# Altium PCB mainPCB_V2.PcbDoc
Units mil, origin at the board's own origin, x right, y up, seen from the top; angles counter-clockwise.
Board outline 4475 x 3960 mil, 2 copper layers (Top Layer, Bottom Layer); 107 components, 80 nets, 371 pads, 23 vias.
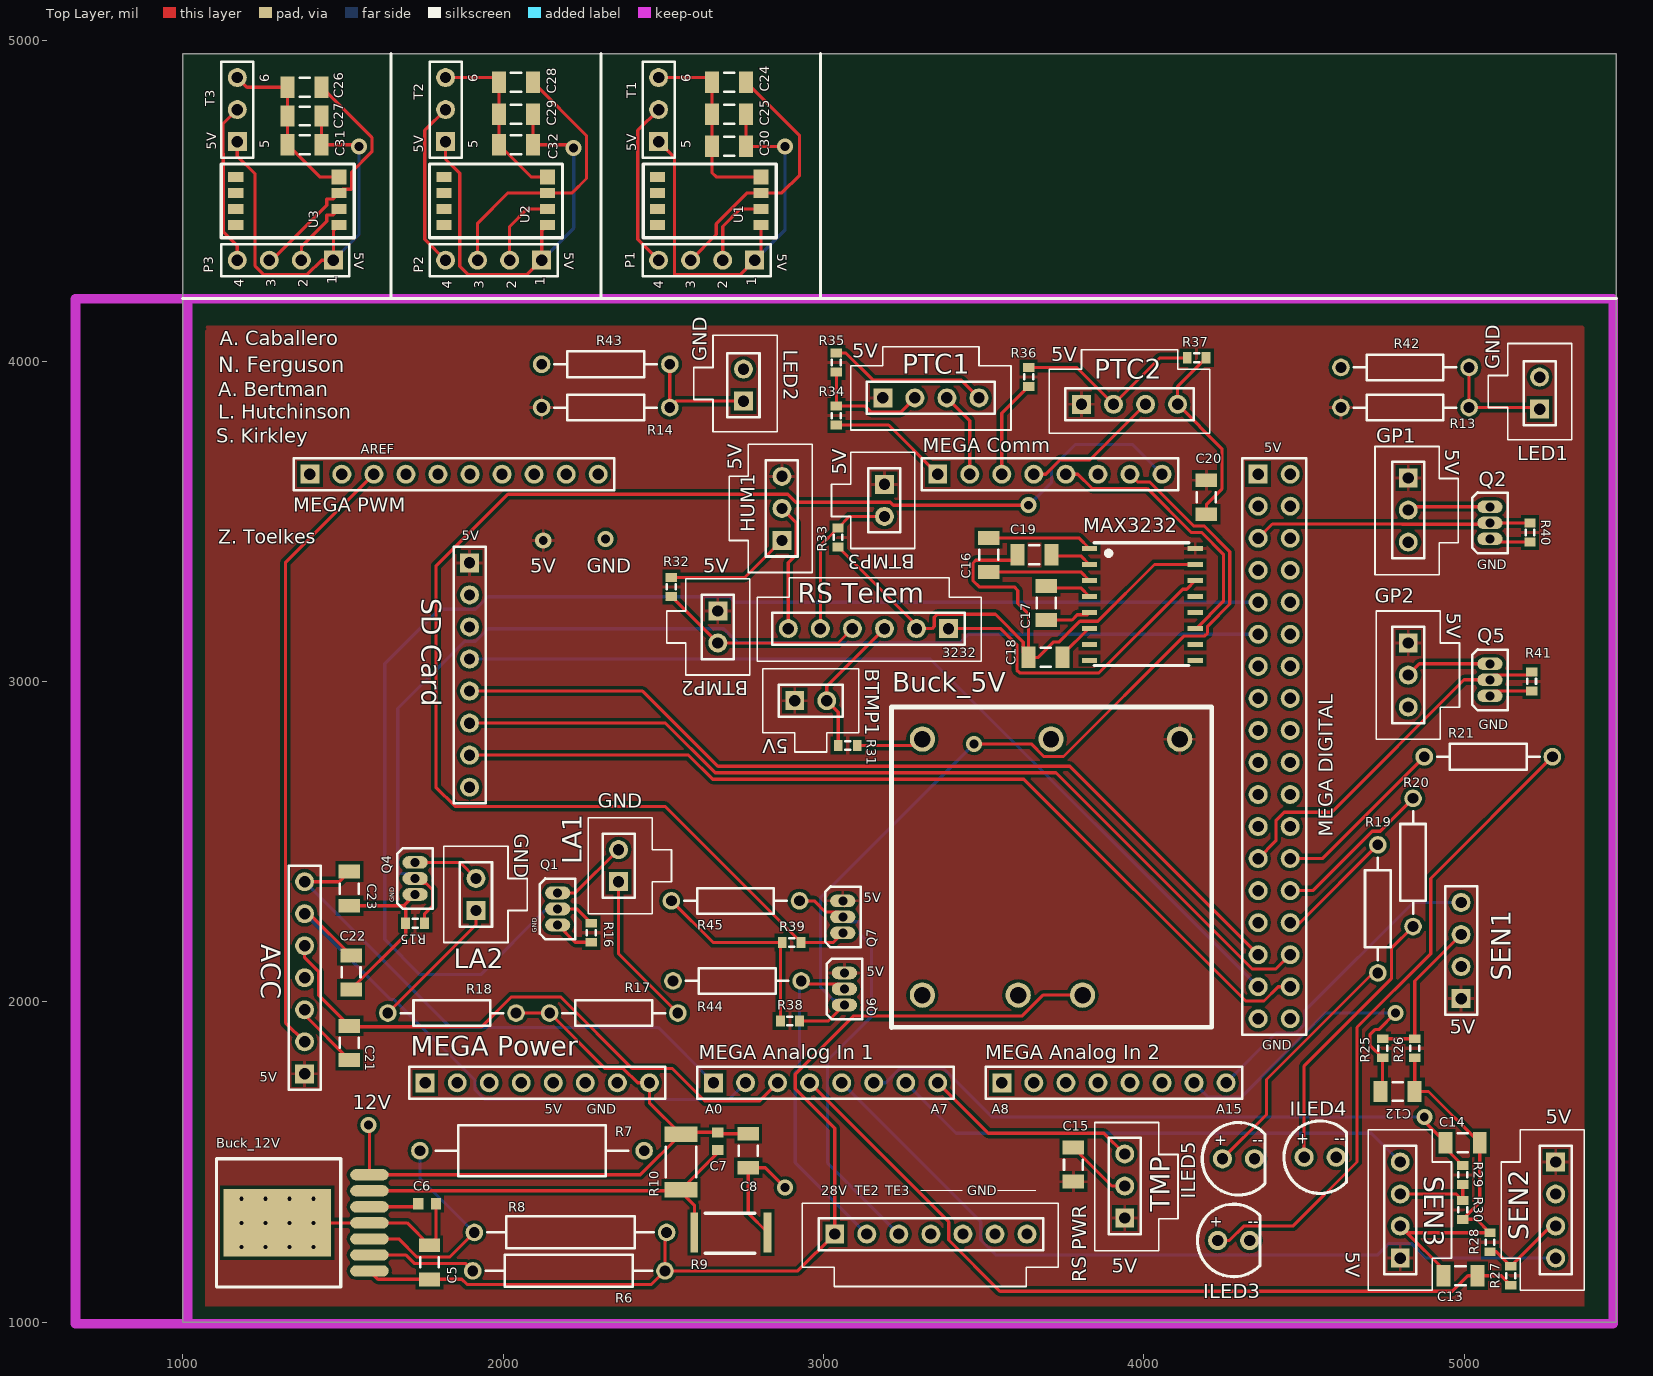
[diagram p0: Top Layer view]
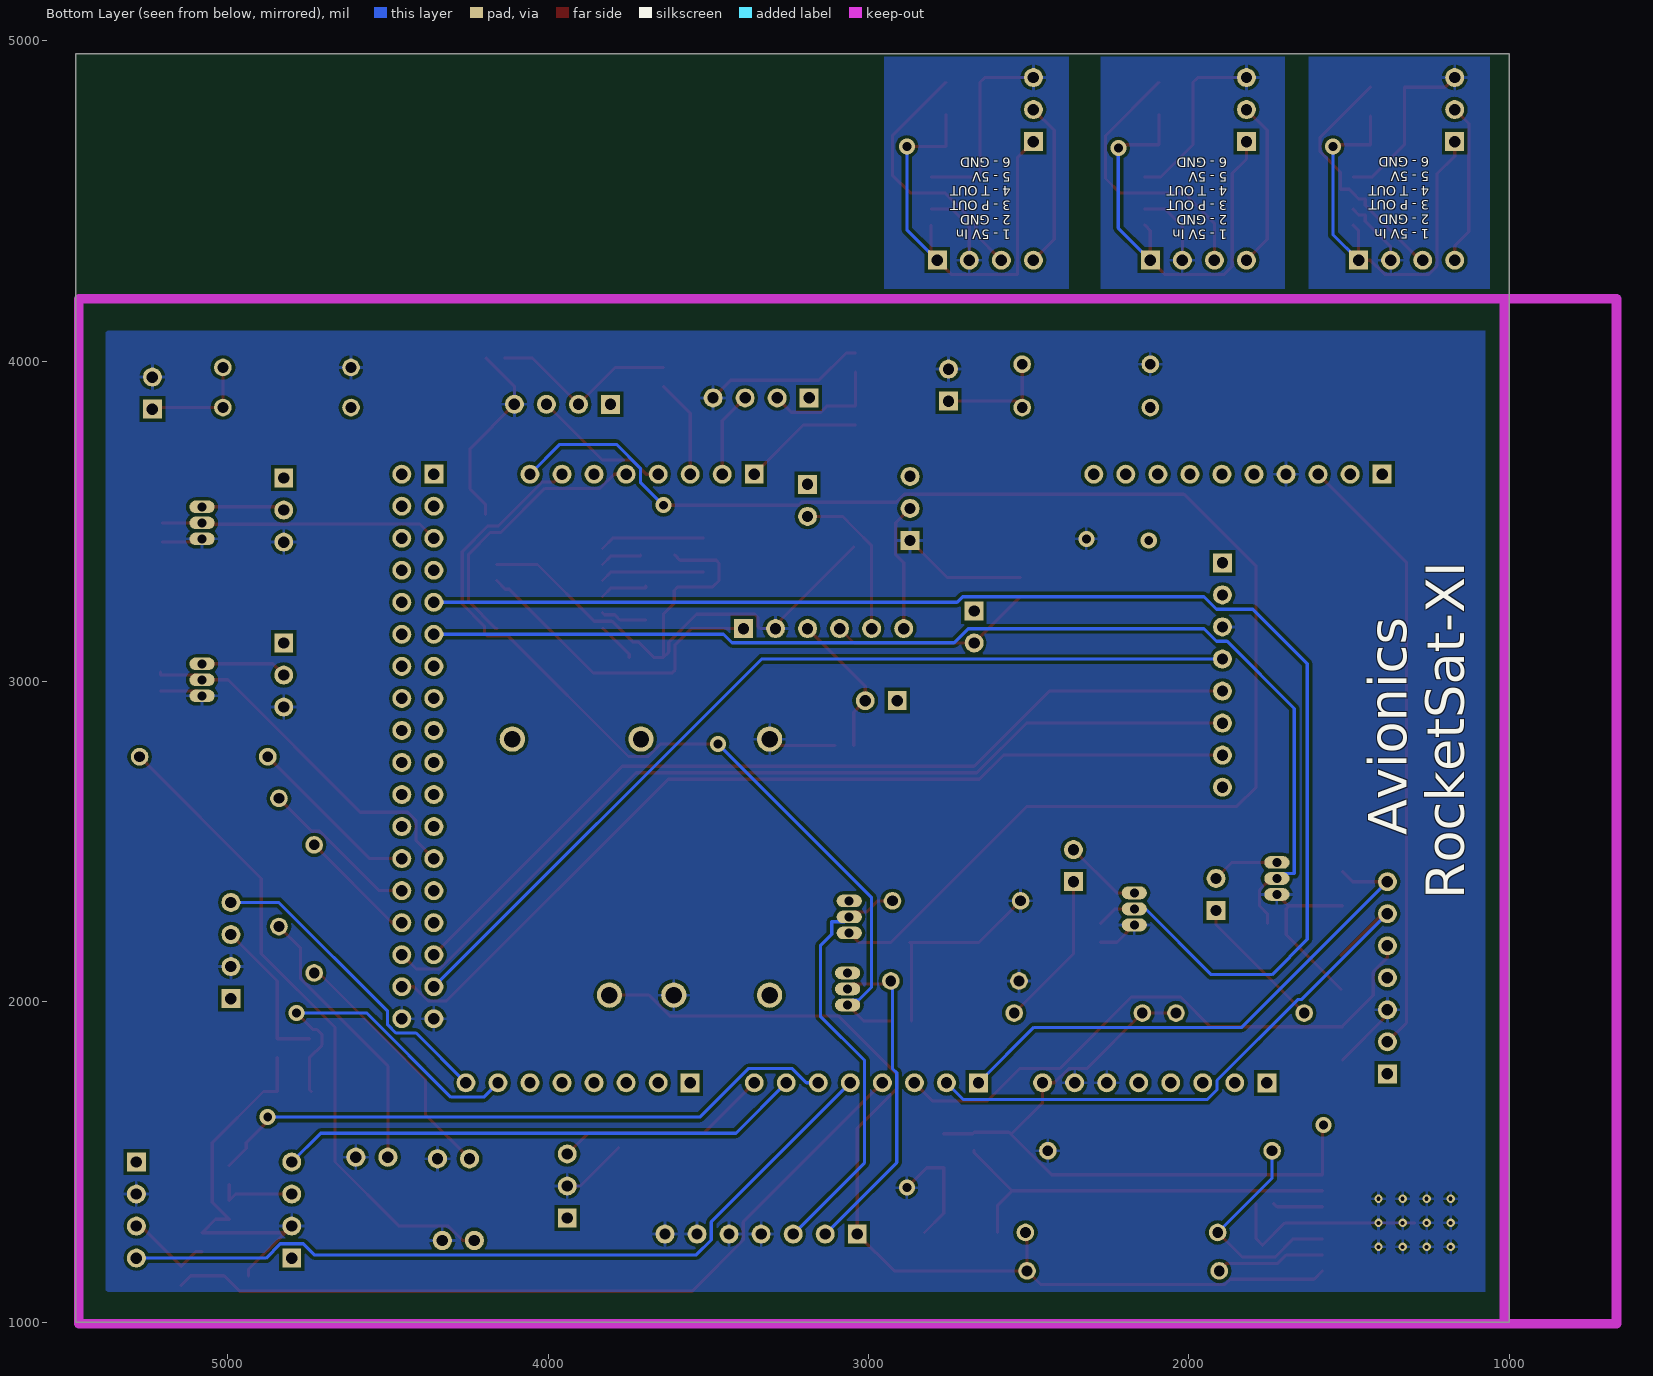
[diagram p1: Bottom Layer view, seen from below]

## Layer stack, top to bottom
Top Solder: solder mask 0.4, Solder Resist, Dk 3.5
Top Layer: signal copper 1.4
Dielectric 1: dielectric 12.6, FR-4, Dk 4.8
Bottom Layer: signal copper 1.4
Bottom Solder: solder mask 0.4, Solder Resist, Dk 3.5

## Board outline
1000,1000 5475,1000 5475,4960 1000,4960

## Design rules (kind name [scope] priority, off if disabled: settings)
Clearance [All] p1: gap=10 ignorepadtopadclearanceinfootprint=FALSE except(0: Arc-Hole Track-Hole SMDPad-Hole THPad-Hole Via-Hole Fill-Hole Poly-Hole Region-Hole Text-Hole)
PolygonConnect [All] p1: connectstyle=Relief reliefconductorwidth=10 reliefentries=4 polygonreliefangle="90 Angle" airgapwidth=10
RoutingVias [All] p1: holewidth=28 width=50 viastyle="Through Hole" minholewidth=28 minwidth=50 maxholewidth=28 maxwidth=50
SolderMaskExpansion [All] p1: expansion=4
Width [All] p1: maxlimit=10 minlimit=10 preferedwidth=10
30 further rules are at their usual default settings.

## Classes and differential pairs
component class Analog_Input: ACC C12 C13 C14 C15 C21 C22 C23 "MEGA Analog In 1" "MEGA Analog In 2" "MEGA PWM" R25 R26 R27 R28 R29 R30 SEN1 SEN2 SEN3 TMP
component class ArduinoPWR-DIG_SDCard: ILED3 ILED4 ILED5 "MEGA DIGITAL" "MEGA Power" R19 R20 R21 "SD Card"
component class GoPro_Actuator_LED: GP1 GP2 LA1 LA2 LED1 LED2 Q1 Q2 Q4 Q5 R13 R14 R15 R16 R17 R18 R40 R41 R42 R43
component class Power_TimerEvents: Buck_5V Buck_12V C5 C6 C7 C8 Q6 Q7 R6 R7 R8 R9 R10 R38 R39 R44 R45 "RS PWR"
component class Telemetry_AnalogSensors_PTC08_Shifter: BTMP1 BTMP2 BTMP3 C16 C17 C18 C19 C20 HUM1 MAX3232 "MEGA Comm" PTC1 PTC2 R31 R32 R33 R34 R35 R36 R37 "RS Telem"
component class temp_presX3: C24 C25 C26 C27 C28 C29 C30 C31 C32 P1 P2 P3 T1 T2 T3 U1 U2 U3

## Components (designator, comment, footprint, x,y, rotation, side; value= is the part's Value field where it differs from the comment)
ACC "Accelerometer" HDR1X7 1380,1775 r90 top
BTMP1 "Boom Temp" HDR1X2 2910,2940 r0 top
BTMP2 "Boom Temp" HDR1X2 2670,3220 r270 top
BTMP3 "Boom Temp" HDR1X2 3190,3615 r270 top
Buck_5V "PDQ10-Q24-S5-D" buck_5V 4111.57,2820 r180 top
Buck_12V "LMZ14201H" LMZ1420 1582.6,1160 r90 top
C5 "10uF" C1206 1770,1186.85 r90 top
C6 "4700pF" 1608[0603] 1762.44,1370 r0 top
C7 "0.022uF" 1608[0603] 2670,1565 r90 top
C8 "47uF" C1206 2765,1535 r270 top
C12 "100nF" C1206 4791.85,1720 r180 top
C13 "100nF" C1206 4988.15,1145 r0 top
C14 "100nF" C1206 4995,1560 r180 top
C15 "0.1uF" C1206 3780,1491.85 r90 top
C16 "0.1uF" C1206 3515,3395 r270 top
C17 "0.1uF" C1206 3695,3245 r270 top
C18 "0.1uF" C1206 3693.15,3075 r0 top
C19 "0.1uF" C1206 3658.15,3395 r180 top
C20 "0.1uF" C1206 4195,3575 r270 top
C21 "0.1uF" C1206 1520,1871.85 r90 top
C22 "0.1uF" C1206 1525,2091.85 r90 top
C23 "0.1uF" C1206 1520,2353.15 r90 top
C24 "100nF" C1206 2705,4870 r0 top
C25 "100nF" C1206 2705,4770 r180 top
C26 "100nF" C1206 1380,4855 r0 top
C27 "100nF" C1206 1380,4765 r180 top
C28 "100nF" C1206 2040,4870 r0 top
C29 "100nF" C1206 2040,4770 r180 top
C30 "0.1uF" C1206 2705,4670 r180 top
C31 "0.1uF" C1206 1380,4675 r180 top
C32 "0.1uF" C1206 2040,4675 r180 top
GP1 "GoPro 1" HDR1X3 4825,3635 r270 top
GP2 "GoPro 2" HDR1X3 4825,3120 r270 top
HUM1 "Humidity" HDR1X3 2870,3440 r90 top
ILED3 "LED" LED 4230,1255 r0 top
ILED4 "LED" LED 4500,1515 r0 top
ILED5 "LED" LED 4245,1510 r0 top
LA1 "Actuator (F)" HDR1X2 2360,2375 r90 top
LA2 "Actuator (R)" HDR1X2 1915,2285 r90 top
LED1 "Front LED" HDR1X2 5235,3850 r90 top
LED2 "Rear LED" HDR1X2 2750,3875 r90 top
MAX3232 "MAX3232" rs232 3930,3415 r0 top
"MEGA Analog In 1" "MEGA Analog In 1" HDR1X8 2656.42,1747.02 r0 top
"MEGA Analog In 2" "MEGA Analog Input 2" HDR1X8 3556.42,1747.02 r0 top
"MEGA Comm" "MEGA Communication" HDR1X8 3356.42,3647.02 r0 top
"MEGA DIGITAL" "MEGA Digital" HDR2X18 4356.42,3647.02 r270 top
"MEGA Power" "MEGA_Power" HDR1X8 1756.42,1747.02 r0 top
"MEGA PWM" "MEGA PWN Output" HDR1X10 1396.42,3647.02 r0 top
P1 "Pressure" HDR1X4 2785,4315 r180 top
P2 "Pressure" HDR1X4 2120,4315 r180 top
P3 "Pressure" HDR1X4 1470,4315 r180 top
PTC1 "PTC08 (R)" HDR1X4 3185,3885 r0 top
PTC2 "PTC08 (F)" HDR1X4 3805,3865 r0 top
Q1 "MOSFET-N" E3#1 2170,2290 r0 top
Q2 "MOSFET-N" E3#2 5080,3495 r0 top
Q4 "MOSFET-N" E3#3 1725,2385 r0 top
Q5 "MOSFET-N" E3#2 5080,3005 r0 top
Q6 "MOSFET-N" E3#2 3065,2040 r0 top
Q7 "MOSFET-N" E3#2 3060,2265 r0 top
R6 "249K" AXIAL-0.6 2205,1160 r0 top
R7 "4.3K" AXIAL-0.7 2090,1535 r180 top
R8 "100K" AXIAL-0.6 2210,1280 r0 top
R9 "2.43K" smd_R9 2825,1280 r180 top
R10 "34K" 12Z-2010 2555,1500 r90 top
R13 "Res2" AXIAL-0.4 4815,3855 r180 top
R14 "Res2" AXIAL-0.4 2320,3855 r180 top
R15 "1K" J1-0603 1725,2245 r0 top
R16 "1K" J1-0603 2275,2215.47 r90 top
R17 "Res2" AXIAL-0.4 2345,1965 r0 top
R18 "Res2" AXIAL-0.4 1840,1965 r180 top
R19 "Res2" AXIAL-0.4 4730,2290 r90 top
R20 "Res2" AXIAL-0.4 4840,2435 r90 top
R21 "Res2" AXIAL-0.4 5075,2765 r180 top
R25 "22K" J1-0603 4745,1855 r270 top
R26 "59K" J1-0603 4845,1855 r90 top
R27 "22K" J1-0603 5145,1145 r90 top
R28 "59K" J1-0603 5080,1249.53 r90 top
R29 "22K" J1-0603 4995,1459.53 r90 top
R30 "59K" J1-0603 4995,1350.47 r90 top
R31 "30K" J1-0603 3075.47,2800 r180 top
R32 "30K" J1-0603 2525,3295 r270 top
R33 "30K" J1-0603 3045,3449.53 r90 top
R34 "10K" J1-0603 3040,3830 r270 top
R35 "10K" J1-0603 3040,3995.47 r90 top
R36 "10K" J1-0603 3640,3950.47 r270 top
R37 "10K" J1-0603 4164.53,4010 r0 top
R38 "1K" J1-0603 2895,1940 r0 top
R39 "1K" J1-0603 2900.47,2185 r0 top
R40 "1K" J1-0603 5205,3465 r90 top
R41 "1K" J1-0603 5210,3000 r90 top
R42 "Res2" AXIAL-0.4 4815,3980 r0 top
R43 "Res2" AXIAL-0.4 2320,3990 r180 top
R44 "1K" AXIAL-0.4 2730,2065 r0 top
R45 "1K" AXIAL-0.4 2725,2315 r0 top
"RS PWR" "RS Power" HDR1X7 3035,1275 r0 top
"RS Telem" "RockSat Telemetry" HDR1X6 3390,3165 r180 top
"SD Card" "SD_Card" HDR1X8 1895,3370 r270 top
SEN1 "Temp/Pres" HDR1X4 4990,2010 r90 top
SEN2 "Temp/Pres" HDR1X4 5285,1500 r270 top
SEN3 "Temp/Pres" HDR1X4 4800,1200 r90 top
T1 "Temperature" HDR1X3 2485,4685 r90 top
T2 "Temperature" HDR1X3 1820,4685 r90 top
T3 "Temperature" HDR1X3 1170,4685 r90 top
TMP "Amb Temp" HDR1X3 3940,1325 r90 top
U1 "Pressure" KP-234 2482.17,4425 r0 top
U2 "Pressure" KP-234 1815,4425 r0 top
U3 "Pressure" KP-234 1165,4425 r0 top

## Footprints (in the part's own frame and the unit in brackets; to place one, negate y for a bottom-side part, rotate by r counter-clockwise, add the part's x,y. Pads: shape width x height; smd on the part's side, far side on the other; paste and mask are expansions set on the pad)
12Z-2010 [mm] "Chip Resistor, Body 5.0x2.5mm, IPC High Density"
  rect 1.2x2.6 smd: 1(-2.2,0) 2(2.2,0)
  silkscreen extent -1.2,-1.2 1.2,1.2, body extent -2.58,-1.33 2.58,1.33, height 0.9
1608[0603] [mm] "Chip Capacitor, Body 1.6x0.8mm, IPC High Density"
  rect 0.8x0.9 smd: 1(-0.7,0) 2(0.7,0)
  body extent -0.87,-0.48 0.87,0.48, height 1.3
AXIAL-0.4 [mm] "Axial Device, Thru-Hole; 2 Leads; 0.4 in Pin Spacing"
  round 1.4 hole 0.85: 1(-5.08,0) 2(5.08,0)
  silkscreen extent -4.06,-1.02 4.06,1.02
AXIAL-0.6 [mm] "Axial Device, Thru-Hole; 2 Leads; 0.6 in Pin Spacing"
  round 1.4 hole 0.85: 1(-7.62,0) 2(7.62,0)
  silkscreen extent -6.6,-1.27 6.6,1.27
AXIAL-0.7 [mm] "Axial Device, Thru-Hole; 2 Leads; 0.7 in Pin Spacing"
  round 1.4 hole 0.85: 1(-8.89,0) 2(8.89,0)
  silkscreen extent -7.62,-2.03 7.62,2.03
buck_5V [mm]
  round 2 hole 1.3: 1(0,0) 2(10.2,0) 3(20.4,0) 4(20.4,20.3) 5(12.8,20.3) 6(7.7,20.3)
  silkscreen extent -2.54,-2.55 22.86,22.86
C1206 [mm] "Chip Capacitor, Body 3.2x1.6mm, IPC High Density"
  rect 1.1x1.7 smd: 1(-1.35,0) 2(1.35,0)
  silkscreen extent -0.4,-0.75 0.4,0.75, body extent -1.7,-0.9 1.7,0.9, height 1.3
E3#1 [mil] "TO, Flat Index; 3 In-Line, Axial Leads; Body Dia. 4.6mm; Lead Dia. 0.5 mm (max)"
  oval 78.74x40 hole 28: 1(0,50) 2(0,0) 3(0,-50)
  silkscreen extent -56,-95 56,95
E3#2 [mil] "TO, Flat Index; 3 In-Line, Axial Leads; Body Dia. 4.6mm; Lead Dia. 0.5 mm (max)"
  oval 78.74x39.37 hole 28: 1(0,50) 2(0,0) 3(0,-50)
  silkscreen extent -56,-95 56,95
E3#3 [mil] "TO, Flat Index; 3 In-Line, Axial Leads; Body Dia. 4.6mm; Lead Dia. 0.5 mm (max)"
  oval 78.74x39.3 hole 28: 1(0,50) 3(0,-50)
  oval 78.74x40 hole 28: 2(0,0)
  silkscreen extent -56,-95 56,95
HDR1X2 [mm] "Connector; Header; 2 Position"
  rect 1.5x1.5 hole 0.9: 1(0,0)
  round 1.5 hole 0.9: 2(2.54,0)
  silkscreen extent -1.27,-1.27 3.81,1.27
HDR1X3 [mm] "Connector; Header; 3 Position"
  rect 1.5x1.5 hole 0.9: 1(0,0)
  round 1.5 hole 0.9: 2(2.54,0) 3(5.08,0)
  silkscreen extent -1.27,-1.27 6.35,1.27
HDR1X4 [mm] "Connector; Header; 4 Position"
  rect 1.5x1.5 hole 0.9: 1(0,0)
  round 1.5 hole 0.9: 2(2.54,0) 3(5.08,0) 4(7.62,0)
  silkscreen extent -1.27,-1.27 8.89,1.27
HDR1X6 [mm] "Connector; Header; 6 Position"
  rect 1.5x1.5 hole 0.9: 1(0,0)
  round 1.5 hole 0.9: 2(2.54,0) 3(5.08,0) 4(7.62,0) 5(10.16,0) 6(12.7,0)
  silkscreen extent -1.27,-1.27 13.97,1.27
HDR1X7 [mm] "Connector; Header; 7 Position"
  rect 1.5x1.5 hole 0.9: 1(0,0)
  round 1.5 hole 0.9: 2(2.54,0) 3(5.08,0) 4(7.62,0) 5(10.16,0) 6(12.7,0) 7(15.24,0)
  silkscreen extent -1.27,-1.27 16.51,1.27
HDR1X8 [mm] "Connector; Header; 8 Position"
  rect 1.5x1.5 hole 0.9: 1(0,0)
  round 1.5 hole 0.9: 2(2.54,0) 3(5.08,0) 4(7.62,0) 5(10.16,0) 6(12.7,0) 7(15.24,0) 8(17.78,0)
  silkscreen extent -1.27,-1.27 19.05,1.27
HDR1X10 [mm] "Connector; Header; 10 Position"
  rect 1.5x1.5 hole 0.9: 1(0,0)
  round 1.5 hole 0.9: 2(2.54,0) 3(5.08,0) 4(7.62,0) 5(10.16,0) 6(12.7,0) 7(15.24,0) 8(17.78,0) 9(20.32,0) 10(22.86,0)
  silkscreen extent -1.27,-1.27 24.13,1.27
HDR2X18 [mm] "Connector; Header; 18x2 Position"
  rect 1.5x1.5 hole 0.9: 1(0,0)
  round 1.5 hole 0.9: 2(0,2.54) 3(2.54,0) 4(2.54,2.54) 5(5.08,0) 6(5.08,2.54) 7(7.62,0) 8(7.62,2.54) 9(10.16,0) 10(10.16,2.54) 11(12.7,0) 12(12.7,2.54) 13(15.24,0) 14(15.24,2.54) 15(17.78,0) 16(17.78,2.54) 17(20.32,0) 18(20.32,2.54) 19(22.86,0) 20(22.86,2.54) 21(25.4,0) 22(25.4,2.54) 23(27.94,0) 24(27.94,2.54) 25(30.48,0) 26(30.48,2.54) 27(33.02,0) 28(33.02,2.54) 29(35.56,0) 30(35.56,2.54) 31(38.1,0) 32(38.1,2.54) 33(40.64,0) 34(40.64,2.54) 35(43.18,0) 36(43.18,2.54)
  silkscreen extent -1.27,-1.27 44.45,3.81
J1-0603 [mm] "Chip Resistor, Body 1.6x0.8mm, IPC High Density"
  rect 0.7x0.9 smd: 1(-0.75,0) 2(0.75,0)
  silkscreen extent -0.2,-0.35 0.2,0.35, body extent -0.85,-0.48 0.85,0.48, height 0.9
KP-234 [mm]
  rect 1.2x0.8 smd: 1(0,3.81) 2(0,2.54) 3(0,1.27) 4(0,0) 5(8.2,0) 6(8.2,1.27) 7(8.2,2.54)
  rect 1.2x1.2 smd: 8(8.2,3.81)
  silkscreen extent -1.14,-1.02 9.4,4.83
LED [mil]
  round 60 hole 35.43: 0(0,0) 1(100,0)
  silkscreen extent -63,-113 133,113, body extent -68,-120 168,116, height 398
LMZ1420 [mm]
  oval 0.89x3.06 smd mask+0.1: 1(0,0) 2(1.27,0) 3(2.54,0) 4(3.81,0) 5(5.08,0) 6(6.35,0) 7(7.62,0)
  rect 5.35x8.54 smd mask+0.1: 4(3.81,7.305)
  silkscreen extent -1.27,2.29 8.89,12.14
rs232 [mil]
  rect 47.5x16 smd: 1(-100,0) 2(-100,-50) 3(-100,-100) 4(-100,-150) 5(-100,-200) 6(-100,-250) 7(-100,-300) 8(-100,-350) 9(230,-350) 10(230,-300) 11(230,-250) 12(230,-200) 13(230,-150) 14(230,-100) 15(230,-50) 16(230,0)
  silkscreen extent -85,-365 210,18
smd_R9 [mm]
  rect 0.6x3.2 smd: 1(0,0) 2(5.8,0)

## Part data
ACC "RS PWR": library part "Header 7", "Header, 7-Pin"
BTMP1 BTMP2 BTMP3 LA1 LA2 LED1 LED2: library part "Header 2", "Header, 2-Pin"
Buck_5V: library part buck_5V
Buck_12V "MEGA Comm" "MEGA DIGITAL" "RS Telem" "SD Card" U1 U2 U3: library part Component_1
C5 C6 C7 C8 C12 C13 C14 C15 C16 C17 C18 C19 C20 C21 C22 C23 C24 C25 C26 C27 C28 C29 C30 C31 C32: library part "Cap Semi", "Capacitor (Semiconductor SIM Model)"
GP1 GP2 HUM1 T1 T2 T3 TMP: library part "Header 3", "Header, 3-Pin"
"MEGA Analog In 1" "MEGA Analog In 2" "MEGA Power": library part "Header 8", "Header, 8-Pin"
"MEGA PWM": library part "Header 10", "Header, 10-Pin"
P1 P2 P3 PTC1 PTC2 SEN1 SEN2 SEN3: library part "Header 4", "Header, 4-Pin"
Q1 Q2 Q4 Q5 Q6 Q7: "N-Channel MOSFET"
R6 R8: library part "Res Adj2", "Variable Resistor"
R7: library part "Res Adj1", "Variable Resistor"
R9: library part smd_R9
R10 R15 R16 R25 R26 R27 R28 R29 R30 R31 R32 R33 R34 R35 R36 R37 R38 R39 R40 R41: library part Res3, "Resistor"
R13 R14 R17 R18 R19 R20 R21 R42 R43: "Resistor"
R44 R45: library part Res2, "Resistor"

## Via types
v1: diameter 25.98, hole 12.99, Top Layer to Bottom Layer, 12 vias
v2: diameter 50, hole 28, Top Layer to Bottom Layer, 11 vias

## Nets (pads, with @x,y where several pads share a name; then routed paths per layer and width w, separated by ;. In a path a pad name is that pad's centre, name@x,y a point inside that pad or via, vN(x,y) a via of type N, cw(c..) or ccw(c..) an arc to the next point about the centre after c; other vN are vias at no path point)
3.3V: "MEGA Power.4"
5V: "SD Card.1" ACC.1 BTMP1.1 BTMP2.1 BTMP3.1 Buck_5V.1 C15.1 C20.1 GP1.1 GP2.1 HUM1.3 MAX3232.16 PTC1.1 PTC2.1 Q6.1 Q7.1 R13.2 R14.2 SEN1.1 SEN2.1 SEN3.1 TMP.1 | length 17.4
  Top Layer w10: Q7.1 3065,2310 Q7.1@3065,2299.68
  other v2: 2125,3440
12V: "MEGA Power.8" Buck_12V.7 C7.2 C8.1 R10.2 R17.1 R18.1 | length 2103.2
  Top Layer w10: v2(1580,1615) 1582.6,1612.4 Buck_12V.7 2428.39,1460 R10.2 ; R18.1 R17.1 2318.45,1791.55 2374.86,1791.55 2419.39,1747.02 2456.42,1747.02 2456.42,1685.19 R10.2 ; C8.1 2674.41,1588.15 C7.2 2560.94,1592.56 R10.2
A0: "MEGA Analog In 1.1" ACC.7 C23.2 | length 1689.5
  Top Layer w10: ACC.7 1488.7,2375 C23.2
  Bottom Layer w10: ACC.7 1835,1920 2483.44,1920 2656.42,1747.02
A1: "MEGA Analog In 1.2" ACC.6 C22.2 | length 1854.1
  Top Layer w10: ACC.6 1395,2275 C22.2
  Bottom Layer w10: ACC.6 1647.44,2007.56 1658.85,2007.56 1911.89,1754.52 1911.89,1725.47 1942.36,1695 2704.4,1695 2756.42,1747.02
A2: "MEGA Analog In 1.3" ACC.5 C21.2 | length 1843.5
  Top Layer w10: ACC.5 1380,2137.97 1424.53,2093.44 1424.53,2020.47 C21.2 1520,1922.44 1932.44,1922.44 2025,2015 2179.7,2015 2403.15,1791.55 2528.45,1791.55 2630,1690 2799.4,1690 2856.42,1747.02
AREF: "MEGA PWM.3" ACC.2 | length 1911.4
  Top Layer w10: ACC.2 1320,1935 1320,3370.6 1596.42,3647.02
GND: "MEGA DIGITAL.35" "MEGA DIGITAL.36" "MEGA Power.6" "MEGA Power.7" "MEGA PWM.4" "RS PWR.4" "RS PWR.5" "RS PWR.6" "RS PWR.7" "RS Telem.2" "SD Card.3" ACC.3 Buck_5V.3 Buck_5V.5 Buck_12V.4 C5.2 C6.2 C8.2 C12.1 C13.1 C14.1 C15.2 C18.1 C19.2 C20.2 C21.1 C22.1 C23.1 GP1.3 GP2.3 HUM1.1 ILED3.1 ILED4.1 ILED5.1 LED1.2 LED2.2 MAX3232.15 PTC1.4 PTC2.4 Q1.3 Q2.3 Q4.3 Q5.3 R7.1 R9.1 R15.1 R16.1 R26.1 R28.2 R30.1 R31.1 R32.1 R33.1 R35.2 R37.2 R38.1 R39.1 R40.1 R41.1 R42.1 R43.2 R44.1 R45.1 SEN1.2 SEN2.2 SEN3.2 TMP.2 | length 7986
  Top Layer w10: Buck_12V.4@1295,1310 v1(1332.6,1310) v1(1407.6,1310) 1582.6,1310 1700,1310 C5.2 1790,1260 C6.2 ; ACC.3 1380,1958.7 C21.1 ; C23.1 1690,2300 ; C22.1 1695.47,2209.17 R15.1 1695.47,2291.02 1690,2296.5 1690,2300 ; Q4.3 1690,2300 ; Q1.3 2224.06,2185.94 R16.1 ; R45.1 2655,2185 R39.1 2865.47,2179.53 R38.1 ; R32.1 2754.53,3324.53 HUM1.1 ; R9.1 2765,1340 C8.2 2818.15,1481.85 v2(2880,1420) ; R35.2 3070,4025 3155,3940 3430,3940 PTC1.4 PTC1.4@3485,3889.06 ; R33.1 3290,3175 3290,3165 3338.83,3165 3345.47,3171.64 3345.47,3200.74 3354.26,3209.53 3536.78,3209.53 3623.35,3122.96 3623.35,3091.65 C18.1 ; R31.1 3288.43,2800 Buck_5V.3 ; C19.2 3588.5,3378.5 3475.32,3378.5 3466.54,3369.72 3466.54,3313.98 3485.52,3295 3595,3295 3606.25,3283.75 3606.25,3243.75 3640,3210 C18.1 ; C15.2 3900,1425 TMP.2 ; MAX3232.15 4032.96,3365 3855.96,3188 3800.04,3188 3735.5,3123.46 3718.43,3123.46 3669.97,3075 C18.1 ; R37.2 4105,3920.94 PTC2.4 4243.46,3726.54 4243.46,3600.28 4195,3551.82 C20.2 ; SEN3.2 4820.94,1279.06 ; R26.1 C12.1 4888.15,1720 C14.1 5048.15,1374.09 R30.1 5038.11,1320.94 R28.2 4820.94,1279.06 ; C13.1 4935,1165 4820.94,1279.06 ; SEN1.2@4989.53,2110.47 SEN1.2 ; Q5.3 5095.31,2970.32 5210,2970.32 R41.1 ; Q2.3 5089.53,3435.47 R40.1
  other v1: 1182.6,1235 1257.6,1235 1332.6,1235 1407.6,1235 1182.6,1310 1257.6,1310 1182.6,1385 1257.6,1385 1332.6,1385 1407.6,1385
  other v2: 2320,3445
GND1: C24.1 C25.2 C30.2 P1.2 T1.3 U1.6 U1.8 | length 861.3
  Top Layer w10: T1.3 2636.85,4885 C24.1 C25.2 C30.2 2651.85,4588.15 2665,4575 U1.8 ; P1.2 2685,4420 2740,4475 U1.6
GND2: C28.1 C29.2 C32.2 P2.2 T2.3 U2.6 U2.8 | length 806.1
  Top Layer w10: T2.3 1971.85,4885 C28.1 C29.2 C32.2 2086.85,4575 U2.8 ; P2.2 2020,4420 2075,4475 U2.6
GND3: C26.1 C27.2 C31.2 P3.2 T3.3 U3.6 U3.8 | length 771.8
  Top Layer w10: T3.3 1200,4855 C26.1 C27.2 C31.2 1426.85,4575 U3.8 ; P3.2 1370,4357.17 1449.21,4436.38 1449.21,4455.75 1468.58,4455.75 U3.6
GPRO_TRIG1: "MEGA DIGITAL.5" Q2.2 R40.2 | length 872.2
  Top Layer w10: 4356.42,3447.02 4400.95,3491.55 4805.48,3491.55 4806.56,3490.47 5080,3490.47 Q2.2 5080.47,3494.53 R40.2
GPRO_TRIG2: "MEGA DIGITAL.25" Q5.2 R41.2 | length 1137.1
  Top Layer w10: 4356.42,2447.02 4411.89,2502.49 4411.89,2565.46 4437.98,2591.55 4585.6,2591.55 4999.06,3005 Q5.2 5095.31,3020.32 5210,3020.32 R41.2
LA_TRIG1: "MEGA DIGITAL.9" Q1.2 R16.2 | length 4474.6
  Top Layer w10: Q1.2 2230,2290 R16.2
  Bottom Layer w10: Q1.2 2135,2290 1930,2085 1740,2085 1630,2195 1630,3055 1800.47,3225.47 1913.44,3225.47 1952.5,3264.53 2705.74,3264.53 2723.25,3247.02 4356.42,3247.02
LA_TRIG2: "MEGA DIGITAL.11" Q4.2 R15.2 | length 3602.2
  Top Layer w10: Q4.2@1725,2369.68 Q4.2 1740.32,2369.68 1759.05,2369.68 1779.37,2349.37 1779.37,2300.32 1754.53,2275.47 R15.2
  Bottom Layer w10: Q4.2 1725,2400.32 1670.63,2400.32 1670.63,2915.63 1880.47,3125.47 1913.44,3125.47 1952.5,3164.53 2688.44,3164.53 2732.5,3120.47 3425.74,3120.47 3452.29,3147.02 4356.42,3147.02
LED_TRIG: "MEGA DIGITAL.7"
NetBTMP1_2: "RS Telem.3" BTMP1.2 R31.2 | length 454.4
  Top Layer w10: R31.2 3045.94,2904.06 BTMP1.2 3010,2985 3190,3165
NetBTMP2_2: "RS Telem.4" BTMP2.2 R32.2 | length 644.2
  Top Layer w10: R32.2 2670,3120.47 BTMP2.2 3045,3120 3090,3165
NetBTMP3_2: "RS Telem.5" BTMP3.2 R33.2 | length 496.7
  Top Layer w10: 2990,3165 2990,3424.06 R33.2 3080.94,3515 BTMP3.2
NetBuck_5V_6: "RS PWR.1" Buck_5V.6 Buck_12V.1 C5.1 R6.2 R8.2 | length 3206.3
  Top Layer w10: Buck_12V.1 1608.9,1133.7 C5.1 1871.11,1133.7 1887.37,1117.44 2462.44,1117.44 R6.2 ; R8.2 2505,1275 R6.2 ; Buck_5V.6 3684.53,2020.79 3619.06,1955.32 3092.92,1955.32 2911.89,1774.29 2911.89,1728.58 3035,1605.47 3035,1275 2920,1160 R6.2
NetBuck_12V_2: Buck_12V.2 R6.1 | length 343.1
  Top Layer w10: Buck_12V.2 1695.38,1210 1722.04,1183.35 1881.65,1183.35 R6.1
NetBuck_12V_3: Buck_12V.3 R7.2 R8.1 | length 708
  Top Layer w10: Buck_12V.3 1673.67,1260 1730.32,1203.35 1833.35,1203.35 R8.1
  Bottom Layer w10: R7.2 1740,1450 R8.1
NetBuck_12V_5: Buck_12V.5 C6.1 | length 156.4
  Top Layer w10: Buck_12V.5 1724.88,1360 C6.1
NetBuck_12V_6: Buck_12V.6 C7.1 R9.2 R10.1 | length 1289.4
  Top Layer w10: Buck_12V.6 2551.61,1410 2596.65,1364.96 R9.2 ; R10.1 2670,1528.39 C7.1
NetC12_2: "MEGA Analog In 2.7" C12.2 R25.2 | length 1059.8
  Top Layer w10: C12.2 4745,1726.3 R25.2 4705.47,1865 4705.47,1897.71 4721.07,1913.31 4733.31,1913.31 v2(4785,1965)
  Bottom Layer w10: 4156.42,1747.02 4200.95,1702.49 4303.15,1702.49 4565.66,1965 v2(4785,1965)
NetC13_2: "MEGA Analog In 1.4" C13.2 R27.1 | length 2523.4
  Top Layer w10: 2956.42,1747.02 3390.47,1312.97 3390.47,1256.56 3550.49,1096.54 4962.87,1096.54 5011.33,1145 C13.2 5115.47,1145 R27.1
NetC14_2: "MEGA Analog In 1.6" C14.2 R29.2 | length 2000.4
  Top Layer w10: v2(4875,1640) 4875,1626.85 C14.2 4941.85,1542.2 R29.2
  Bottom Layer w10: 3156.42,1747.02 3193.45,1747.02 3237.98,1791.55 3374.86,1791.55 3526.41,1640 v2(4875,1640)
NetC16_1: C16.1 MAX3232.1 | length 328.7
  Top Layer w10: C16.1 3796.85,3448.15 MAX3232.1
NetC16_2: C16.2 MAX3232.3 | length 326.1
  Top Layer w10: C16.2 3803.15,3341.85 MAX3232.3
NetC17_1: C17.1 MAX3232.4 | length 152.3
  Top Layer w10: C17.1 3695,3292 3803,3292 MAX3232.4
NetC17_2: C17.2 MAX3232.5 | length 144.6
  Top Layer w10: C17.2 3775.6,3191.85 3791.75,3208 3823,3208 MAX3232.5
NetC18_2: C18.2 MAX3232.6 | length 126.4
  Top Layer w10: C18.2 3746.3,3084.26 3827.04,3165 MAX3232.6
NetC19_1: C19.1 MAX3232.2 | length 132.9
  Top Layer w10: C19.1 3711.3,3392 3803,3392 MAX3232.2
NetGP1_2: GP1.2 Q2.1 | length 259.1
  Top Layer w10: GP1.2 4835,3545 Q2.1
NetGP2_2: GP2.2 Q5.1 | length 269.5
  Top Layer w10: GP2.2 4860,3055 Q5.1
NetHUM1_2: "RS Telem.6" HUM1.2 | length 403.6
  Top Layer w10: HUM1.2 2914.53,3495.47 2914.53,3395.47 2890,3370.94 2890,3165
NetILED3_0: ILED3.0 R21.1 | length 2054.2
  Top Layer w10: ILED3.0 4266.36,1255 4311.36,1300 4465,1300 4665,1500 4665,1920 4895,2150 4895,2385 R21.1
NetILED4_0: ILED4.0 R20.1 | length 860.8
  Top Layer w10: ILED4.0 4500,1799.81 4772.56,2072.37 4772.56,2167.56 R20.1
NetILED5_0: ILED5.0 R19.1 | length 789.7
  Top Layer w10: ILED5.0 4382.5,1647.5 4382.5,1757.5 4715,2090 R19.1
NetLA1_1: LA1.1 R17.2 | length 486.6
  Top Layer w10: LA1.1 2360,2150 R17.2
NetLA1_2: LA1.2 Q1.1 | length 245.9
  Top Layer w10: Q1.1 2225,2340 LA1.2
NetLA2_1: LA2.1 R18.2 | length 433.9
  Top Layer w10: R18.2 1915,2240 LA2.1
NetLA2_2: LA2.2 Q4.1 | length 210.7
  Top Layer w10: Q4.1 1865,2435 LA2.2
NetLED1_1: LED1.1 R13.1 R42.2 | length 347.1
  Top Layer w10: R42.2 R13.1 5230,3855 LED1.1
NetLED2_1: LED2.1 R14.1 R43.1 | length 373.3
  Top Layer w10: R43.1 R14.1 2540,3875 LED2.1
NetMAX3232_14: "RS Telem.1" MAX3232.14 | length 993.3
  Top Layer w10: 3390,3165 3553.02,3165 3603.35,3114.68 3603.35,3035.32 3612.13,3026.54 3859.79,3026.54 4121.25,3288 4133,3288 MAX3232.14
"NetMEGA Analog In 1_5": "MEGA Analog In 1.5" SEN2.4 | length 2516.8
  Bottom Layer w10: 3056.42,1747.02 3490.47,1312.97 3490.47,1256.56 3537.03,1210 4729.73,1210 4764.26,1244.53 4835.74,1244.53 4880.27,1200 SEN2.4
"NetMEGA Analog In 1_7": "MEGA Analog In 1.7" SEN3.4 | length 1645.9
  Bottom Layer w10: 3256.42,1747.02 3413.44,1590 4710,1590 SEN3.4
"NetMEGA Analog In 1_8": "MEGA Analog In 1.8" TMP.3 | length 675.5
  Top Layer w10: 3356.42,1747.02 3513.44,1590 3875,1590 TMP.3
"NetMEGA Analog In 2_8": "MEGA Analog In 2.8" SEN1.4 | length 991.6
  Bottom Layer w10: 4256.42,1747.02 4411.89,1902.49 4474.86,1902.49 4500.95,1928.58 4500.95,1970.95 4840,2310 SEN1.4
"NetMEGA Comm_1": "MEGA Comm.1" R34.2 | length 380
  Top Layer w10: R34.2 3202.97,3800.47 3356.42,3647.02
"NetMEGA Comm_2": "MEGA Comm.2" PTC1.3 | length 267.6
  Top Layer w10: PTC1.3 3456.42,3813.58 3456.42,3647.02
"NetMEGA Comm_3": "MEGA Comm.3" R36.2 | length 308.5
  Top Layer w10: 3556.42,3647.02 3556.42,3837.36 R36.2
"NetMEGA Comm_4": "MEGA Comm.4" PTC2.3 | length 438.9
  Top Layer w10: 3656.42,3647.02 3693.45,3647.02 3737.98,3691.55 3831.55,3691.55 PTC2.3
"NetMEGA DIGITAL_26": "MEGA DIGITAL.26" R21.2 | length 550.3
  Top Layer w10: 4456.42,2447.02 4557.02,2447.02 R21.2
"NetMEGA DIGITAL_28": "MEGA DIGITAL.28" R20.2 | length 502.9
  Top Layer w10: 4456.42,2347.02 4526.83,2347.02 4712.37,2532.56 4737.56,2532.56 R20.2
"NetMEGA DIGITAL_30": "MEGA DIGITAL.30" R19.2 | length 374.2
  Top Layer w10: 4456.42,2247.02 4487.02,2247.02 R19.2
"NetMEGA DIGITAL_31": "MEGA DIGITAL.31" "SD Card.5" | length 2802.3
  Top Layer w10: 1895,2970 2435,2970 2670,2735 3768.44,2735 4356.42,2147.02
"NetMEGA DIGITAL_32": "MEGA DIGITAL.32" "SD Card.6" | length 2897.8
  Top Layer w10: 1895,2870 2506.72,2870 2661.72,2715 3725.47,2715 4337.98,2102.49 4411.89,2102.49 4456.42,2147.02
"NetMEGA DIGITAL_33": "MEGA DIGITAL.33" "SD Card.4" | length 2885.2
  Bottom Layer w10: 1895,3070 3333.44,3070 4356.42,2047.02
"NetMEGA DIGITAL_34": "MEGA DIGITAL.34" "SD Card.7" | length 2897.8
  Top Layer w10: 1895,2770 2578.43,2770 2653.43,2695 3625,2695 4317.51,2002.49 4374.86,2002.49 4419.39,2047.02 4456.42,2047.02
NetPTC1_2: PTC1.2 R34.1 R35.1 | length 377.8
  Top Layer w10: R35.1 R34.1 3130.2,3859.53 3149.26,3840.47 3240.47,3840.47 PTC1.2
NetPTC2_2: PTC2.2 R36.1 R37.1 | length 602.7
  Top Layer w10: R36.1 3790,3980 PTC2.2 4050,4010 R37.1
NetQ6_2: "RS PWR.2" Q6.2 R44.2 | length 1040.9
  Top Layer w10: R44.2 2930,2055.32 3049.68,2055.32 Q6.2
  Bottom Layer w10: R44.2 2925,2060 2925,1791.68 2911.89,1778.57 2911.89,1498.11 3135,1275
NetQ7_2: "RS PWR.3" Q7.2 R45.2 | length 1355.5
  Top Layer w10: R45.2 2970.95,2315 3005.63,2280.32 3044.68,2280.32 Q7.2
  Bottom Layer w10: Q7.2 3075.32,2249.68 3114.37,2249.68 3114.37,2210.63 3150,2175 3150,1955 3011.89,1816.89 3011.89,1498.11 3235,1275
NetR25_1: R25.1 R26.2 SEN1.3 | length 485.5
  Top Layer w10: R25.1 R26.2 4845,2065 SEN1.3
NetR27_2: R27.2 R28.1 SEN2.3 | length 275.8
  Top Layer w10: R28.1 5099.53,1220 R27.2 5270.47,1300 SEN2.3
NetR29_1: R29.1 R30.2 SEN3.3 | length 253.3
  Top Layer w10: SEN3.3 4975,1400 R30.2 R29.1
OUTP1: C24.2 P1.3 U1.7 | length 828.4
  Top Layer w10: P1.3 2665,4395 2665,4428.28 2761.72,4525 U1.7 2870,4525 2925,4580 2925,4703.15 C24.2
OUTP2: C28.2 P2.3 U2.7 | length 882.1
  Top Layer w10: P2.3 1920,4430 2015,4525 U2.7 2215,4525 2260,4570 2260,4703.15 C28.2
OUTP3: C26.2 P3.3 U3.7 | length 769.4
  Top Layer w10: P3.3 1277.83,4315 1449.21,4486.38 1449.21,4505.75 1468.58,4505.75 U3.7 1499.21,4536.38 1526.46,4536.38 1526.46,4589.89 1590,4653.43 1590,4698.15 C26.2
OUTT1: P1.4 T1.2 | length 523.8
  Top Layer w10: P1.4 2420,4380 2420,4720 T1.2
OUTT2: P2.4 T2.2 | length 523.8
  Top Layer w10: P2.4 1755,4380 1755,4720 T2.2
OUTT3: P3.4 T3.2 | length 506.9
  Top Layer w10: P3.4 1170,4359.42 1126.38,4403.04 1126.38,4648.35 1125.47,4649.26 1125.47,4740.47 T3.2
RS232_TX: "MEGA Comm.5" MAX3232.11 | length 865.3
  Top Layer w10: 3756.42,3647.02 3793.45,3647.02 3837.98,3602.49 4009.69,3602.49 4146.99,3465.2 4179.8,3465.2 4247.96,3397.04 4247.96,3250 4162.96,3165 MAX3232.11
TE2_INT: "MEGA Comm.7" Q6.3 R38.2 | length 2816.5
  Top Layer w10: R38.2 3015,1940 Q6.3 ; v2(3470,2805) 3648.11,2805 3687.48,2765.63 3748.88,2765.63 4125.25,3142 4189.96,3142 4198.75,3150.79 4198.75,3172.5 4267.96,3241.72 4267.96,3405.32 4188.09,3485.2 4155.27,3485.2 4017.98,3622.49 3980.95,3622.49 3956.42,3647.02
  Bottom Layer w10: Q6.3 3049.68,2005.32 3030.95,2005.32 2990,2046.26 2990,2325 v2(3470,2805)
TE3_INT: "MEGA Comm.8" Q7.3 R39.2 | length 4689.8
  Top Layer w10: Q7.3 3030,2185 R39.2 2505,2610 1850,2610 1790,2670 1790,3360 2014.53,3584.53 2888.44,3584.53 2913.44,3559.53 3208.44,3559.53 3217.97,3550 v2(3640,3550)
  Bottom Layer w10: v2(3640,3550) 3711.89,3621.89 3711.89,3665.46 3786.43,3740 3963.44,3740 4056.42,3647.02
VDD5V_1: C25.1 C30.1 P1.1 T1.1 U1.5 | length 1438.8
  Top Layer w10: T1.1 2535,4635 2535,4270 2740,4270 P1.1 2805,4335 U1.5 ; C25.1 C30.1 v2(2880,4670)
  Bottom Layer w10: P1.1 2880,4410 v2(2880,4670)
VDD5V_2: C29.1 C32.1 P2.1 T2.1 U2.5 | length 1427
  Top Layer w10: T2.1 1820,4630.58 1864.53,4586.06 1864.53,4295.47 1889.53,4270.47 2075.47,4270.47 P2.1 2120,4407.17 U2.5 ; C29.1 C32.1 2210,4675 v2(2220,4665)
  Bottom Layer w10: P2.1 2220,4415 v2(2220,4665)
VDD5V_3: C27.1 C31.1 P3.1 T3.1 U3.5 | length 1399.6
  Top Layer w10: T3.1 1170,4639.37 1225.47,4583.9 1225.47,4296.56 1251.56,4270.47 1388.44,4270.47 1432.97,4315 P3.1 1470,4407.17 U3.5 ; C27.1 C31.1 1545,4675 v2(1550,4670)
  Bottom Layer w10: P3.1 1550,4395 v2(1550,4670)
pads on no net: "MEGA Analog In 2.1" "MEGA Analog In 2.2" "MEGA Analog In 2.3" "MEGA Analog In 2.4" "MEGA Analog In 2.5" "MEGA Analog In 2.6" "MEGA Comm.6" "MEGA DIGITAL.1" "MEGA DIGITAL.2" "MEGA DIGITAL.3" "MEGA DIGITAL.4" "MEGA DIGITAL.6" "MEGA DIGITAL.8" "MEGA DIGITAL.10" "MEGA DIGITAL.12" "MEGA DIGITAL.13" "MEGA DIGITAL.14" "MEGA DIGITAL.15" "MEGA DIGITAL.16" "MEGA DIGITAL.17" "MEGA DIGITAL.18" "MEGA DIGITAL.19" "MEGA DIGITAL.20" "MEGA DIGITAL.21" "MEGA DIGITAL.22" "MEGA DIGITAL.23" "MEGA DIGITAL.24" "MEGA DIGITAL.27" "MEGA DIGITAL.29" "MEGA Power.1" "MEGA Power.2" "MEGA Power.3" "MEGA Power.5" "MEGA PWM.1" "MEGA PWM.2" "MEGA PWM.5" "MEGA PWM.6" "MEGA PWM.7" "MEGA PWM.8" "MEGA PWM.9" "MEGA PWM.10" "SD Card.2" "SD Card.8" ACC.4 Buck_5V.2 Buck_5V.4 MAX3232.7 MAX3232.8 MAX3232.9 MAX3232.10 MAX3232.12 MAX3232.13 U1.1 U1.2 U1.3 U1.4 U2.1 U2.2 U2.3 U2.4 U3.1 U3.2 U3.3 U3.4

## Polygon pours and split planes (outlines as drawn)
GND3 on Bottom Layer "GND3" (solid, pour order 0): 1060,4950 1060,4225 1625,4225 1625,4950 1060,4950
GND2 on Bottom Layer "GND2" (solid, pour order 4): 1700,4950 1700,4225 2275,4225 2275,4950 1700,4950
GND1 on Bottom Layer "GND1" (solid, pour order 6): 2375,4950 2375,4225 2950,4225 2950,4950 2375,4950
GND on Bottom Layer "GND" (solid, pour order 8): 1075,4095 1075,1095 5375,1095 5380,1100 5380,4090 5375,4095 1075,4095
5V on Top Layer "5V" (solid, pour order 10): 1075,4100 1070,4095 1070,1050 5375,1050 5375,4105 5370,4110 1070,4110

## Keep-outs
Keep-Out Layer:
  lines w30: 1015,1000 1015,4195 ; 665,995 665,4195 5465,4195 5465,995 665,995

## Silkscreen, mask and mechanical layers (free items; w line width, h text height)
Top Overlay:
  lines w3: 3302.98,1411.42 3432.98,1411.42 ; 3542.98,1411.42 3662.98,1411.42
  lines w5: 1815,2185 1815,2485 2015,2485 2015,2385 2075,2385 2075,2285 2015,2285 2015,2185 1815,2185 ; 2265.34,2275.08 2265.34,2575.08 2465.34,2575.08 2465.34,2475.08 2525.34,2475.08 2525.34,2375.08 2465.34,2375.08 2465.34,2275.08 2265.34,2275.08 ; 2510,3120 2570,3120 2570,3020 2770,3020 2770,3320 2570,3320 2570,3220 2510,3220 2510,3120 ; 2595,3880 2595,3980 2655,3980 2655,4080 2855,4080 2855,3780 2655,3780 2655,3880 2595,3880 ; 2705,3440 2705,3640 2765,3640 2765,3740 2965,3740 2965,3340 2765,3340 2765,3440 2705,3440 ; 2792.74,3063.09 2792.74,3263.09 2892.74,3263.09 2892.74,3323.09 3392.74,3323.09 3392.74,3263.09 3492.74,3263.09 3492.74,3063.09 2792.74,3063.09 ; 2810.08,2839.66 2910.08,2839.66 2910.08,2779.66 3010.08,2779.66 3010.08,2839.66 3110.08,2839.66 3110.08,3039.66 2810.08,3039.66 2810.08,2839.66 ; 2932.98,1171.42 2932.98,1371.42 3732.98,1371.42 3732.98,1171.42 3632.98,1171.42 3632.98,1111.42 3032.98,1111.42 3032.98,1171.42 2932.98,1171.42 ; 3024.66,3514.92 3024.66,3614.92 3084.66,3614.92 3084.66,3714.92 3284.66,3714.92 3284.66,3414.92 3084.66,3414.92 3084.66,3514.92 3024.66,3514.92 ; 3085,3785 3085,3985 3185,3985 3185,4045 3485,4045 3485,3985 3585,3985 3585,3785 3085,3785 ; 3705,3775 4205,3775 4205,3975 4105,3975 4105,4035 3805,4035 3805,3975 3705,3975 3705,3775 ; 3846.23,1223.38 4046.23,1223.38 4046.23,1323.38 4106.23,1323.38 4106.23,1523.38 4046.23,1523.38 4046.23,1623.38 3846.23,1623.38 3846.23,1223.38 ; 4700,1100 4900,1100 4900,1200 4960,1200 4960,1500 4900,1500 4900,1600 4700,1600 4700,1100 ; 4721.23,3333.38 4721.23,3733.38 4921.23,3733.38 4921.23,3633.38 4981.23,3633.38 4981.23,3433.38 4921.23,3433.38 4921.23,3333.38 4721.23,3333.38 ; 4725,2820 4725,3220 4925,3220 4925,3120 4985,3120 4985,2920 4925,2920 4925,2820 4725,2820 ; 5075,3855 5075,3955 5135,3955 5135,4055 5335,4055 5335,3755 5135,3755 5135,3855 5075,3855 ; 5115,1200 5115,1500 5175,1500 5175,1600 5375,1600 5375,1100 5175,1100 5175,1200 5115,1200
  lines w10: 1000,4195 5475,4195 ; 1650,4195 1650,4960 ; 2305,4195 2305,4960 ; 2630,1215 2785,1215 ; 2630,1340 2785,1340 ; 2990,4195 2990,4960
  text "6" at 1270,4870 h30 r90
  text "6" at 1920,4870 h30 r90
  text "6" at 2585,4870 h30 r90
  text "5" at 1270,4665 h30 r90
  text "5" at 1920,4665 h30 r90
  text "5" at 2585,4665 h30 r90
  text "5V" at 1105,4660 h30 r90
  text "5V" at 2415,4655 h30 r90
  text "5V" at 1750,4650 h30 r90
  text "5V" at 1535,4340 h30 r270
  text "5V" at 2190,4340 h30 r270
  text "5V" at 2855,4335 h30 r270
  text "1" at 1480,4240 h30 r90
  text "1" at 2130,4235 h30 r90
  text "1" at 2790,4235 h30 r90
  text "4" at 1190,4230 h30 r90
  text "3" at 1290,4230 h30 r90
  text "2" at 1390,4230 h30 r90
  text "4" at 1840,4225 h30 r90
  text "3" at 1940,4225 h30 r90
  text "2" at 2040,4225 h30 r90
  text "4" at 2500,4225 h30 r90
  text "3" at 2600,4225 h30 r90
  text "2" at 2700,4225 h30 r90
  text "A. Caballero" at 1115,4050 h45
  text "5V" at 3090,4010 h45
  text "GND" at 2635,4000 h45 r90
  text "5V" at 3710,4000 h45
  text "GND" at 5110,3975 h45 r90
  text "N. Ferguson" at 1110,3965 h48
  text "A. Bertman" at 1110,3890 h45
  text "L. Hutchinson" at 1110,3820 h45
  text "S. Kirkley" at 1105,3745 h45
  text "5V" at 4940,3725 h45 r270
  text "5V" at 4375,3715 h30
  text "AREF" at 1555,3710 h30
  text "5V" at 2745,3660 h45 r90
  text "5V" at 3070,3645 h45 r90
  text "5V" at 1870,3440 h30
  text "Z. Toelkes" at 1110,3430 h43
  text "5V" at 2085,3340 h45
  text "GND" at 2260,3340 h45
  text "5V" at 2625,3340 h45
  text "5V" at 4945,3215 h45 r270
  text "3232" at 3370,3075 h30
  text "5V" at 2890,2820 h45 r180
  text "GND" at 2295,2605 h45
  text "GND" at 2035,2525 h45 r270
  text "5V" at 4955,1900 h45
  text "GND" at 4370,1850 h30
  text "5V" at 1240,1750 h30
  text "12V" at 1530,1665 h45
  text "5V" at 2130,1650 h30
  text "GND" at 2260,1650 h30
  text "A0" at 2630,1650 h30
  text "A7" at 3335,1650 h30
  text "A8" at 3525,1650 h30
  text "A15" at 4225,1650 h30
  text "5V" at 5255,1620 h45
  text "28V" at 2992.98,1396.42 h30
  text "TE2" at 3097.98,1396.42 h30
  text "TE3" at 3192.98,1396.42 h30
  text "GND" at 3447.98,1396.42 h30
  text "5V" at 4630,1220 h45 r270
  text "5V" at 3900,1155 h45
Bottom Overlay:
  text "6 - GND" at 1249.21,4636.38 h30 r180
  text "6 - GND" at 1880,4635 h30 r180
  text "6 - GND" at 2555,4635 h30 r180
  text "5 - 5V" at 1249.21,4591.38 h30 r180
  text "5 - 5V" at 1880,4590 h30 r180
  text "5 - 5V" at 2555,4590 h30 r180
  text "4 - T OUT" at 1249.21,4546.38 h30 r180
  text "4 - T OUT" at 1880,4545 h30 r180
  text "4 - T OUT" at 2555,4545 h30 r180
  text "3 - P OUT" at 1249.21,4501.38 h30 r180
  text "3 - P OUT" at 1880,4500 h30 r180
  text "3 - P OUT" at 2555,4500 h30 r180
  text "2 - GND" at 1249.21,4456.38 h30 r180
  text "2 - GND" at 1880,4455 h30 r180
  text "2 - GND" at 2555,4455 h30 r180
  text "1 - 5V In" at 1249.21,4411.38 h30 r180
  text "1 - 5V In" at 1880,4410 h30 r180
  text "1 - 5V In" at 2555,4410 h30 r180
  text "Avionics" at 1320,2520 h120 r270
  text "RocketSat-XI" at 1140,2320 h120 r270
Mechanical 1:
  lines w10: 1100,1100 5375,1100 5375,4860 ; 1100,4095 5375,4095 ; 1000,1000 1000,4960 5475,4960 5475,1000 1000,1000
Mechanical 13:
  lines w10: 666.42,1642.02 1291.42,1642.02 4666.42,1642.02 4666.42,3742.02 666.42,3742.02 ; 5645,2640 4910,2640 4910,1710 5650,1710 5650,2640 ; 700,2515 700,3515 1955,3515 1955,2515 700,2515 ; 705,1700 705,2450 1455,2450 1455,1700 705,1700

## Text inside footprints (layer, text, board x,y; h text height)
ILED3: Top Overlay "+     --" at 4205,1285 h60
ILED4: Top Overlay "+     --" at 4475,1545 h60
ILED5: Top Overlay "+     --" at 4220,1540 h60
Q1: Top Overlay "GND" at 2105,2215 h15 r90
Q2: Top Overlay "GND" at 5040,3350 h30
Q4: Top Overlay "GND" at 1660,2310 h15 r90
Q5: Top Overlay "GND" at 5045,2850 h30
Q6: Top Overlay "5V" at 3135,2080 h30
Q7: Top Overlay "5V" at 3125,2310 h30